# Altium PCB powerAmp.PcbDoc
Units mil, origin at the board's own origin, x right, y up, seen from the top; angles counter-clockwise.
Board outline 2750 x 2000 mil, 2 copper layers (Top Layer, Bottom Layer); 15 components, 0 nets, 32 pads, 0 vias.
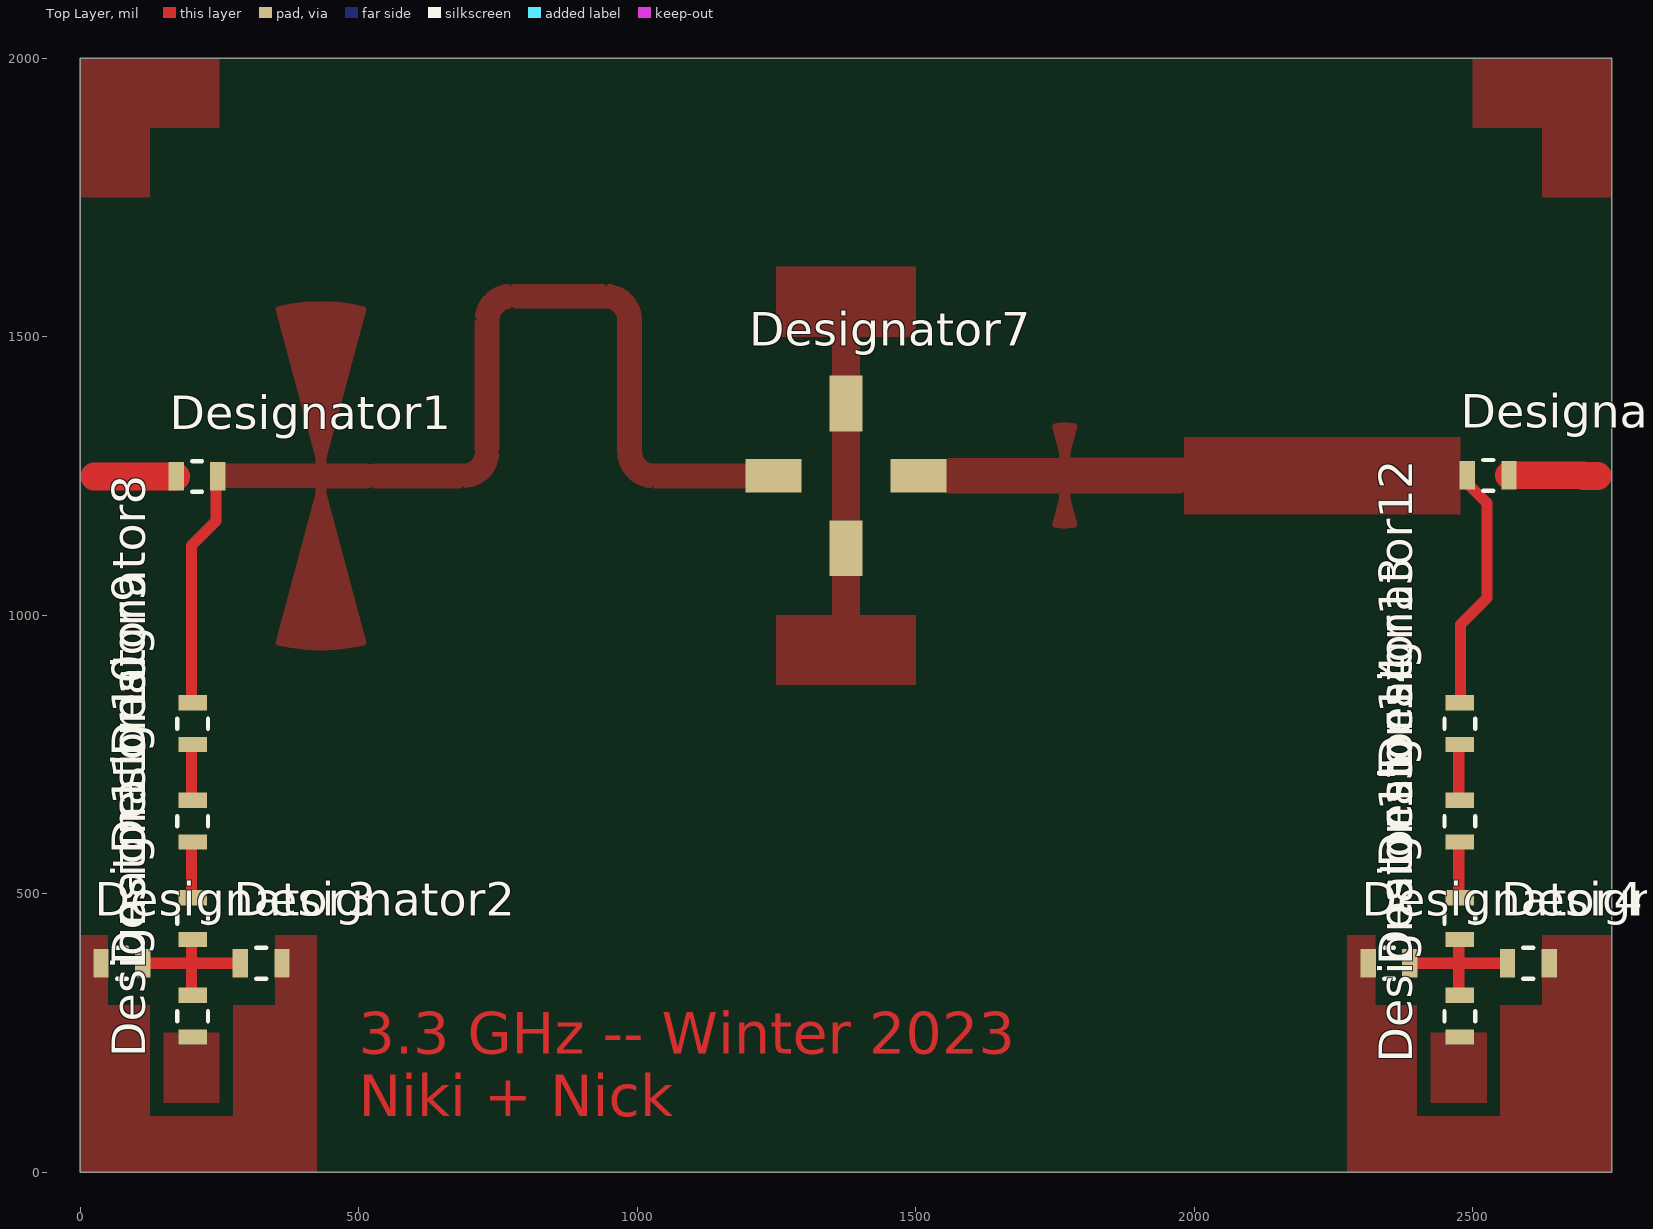
[diagram p0: Top Layer view]
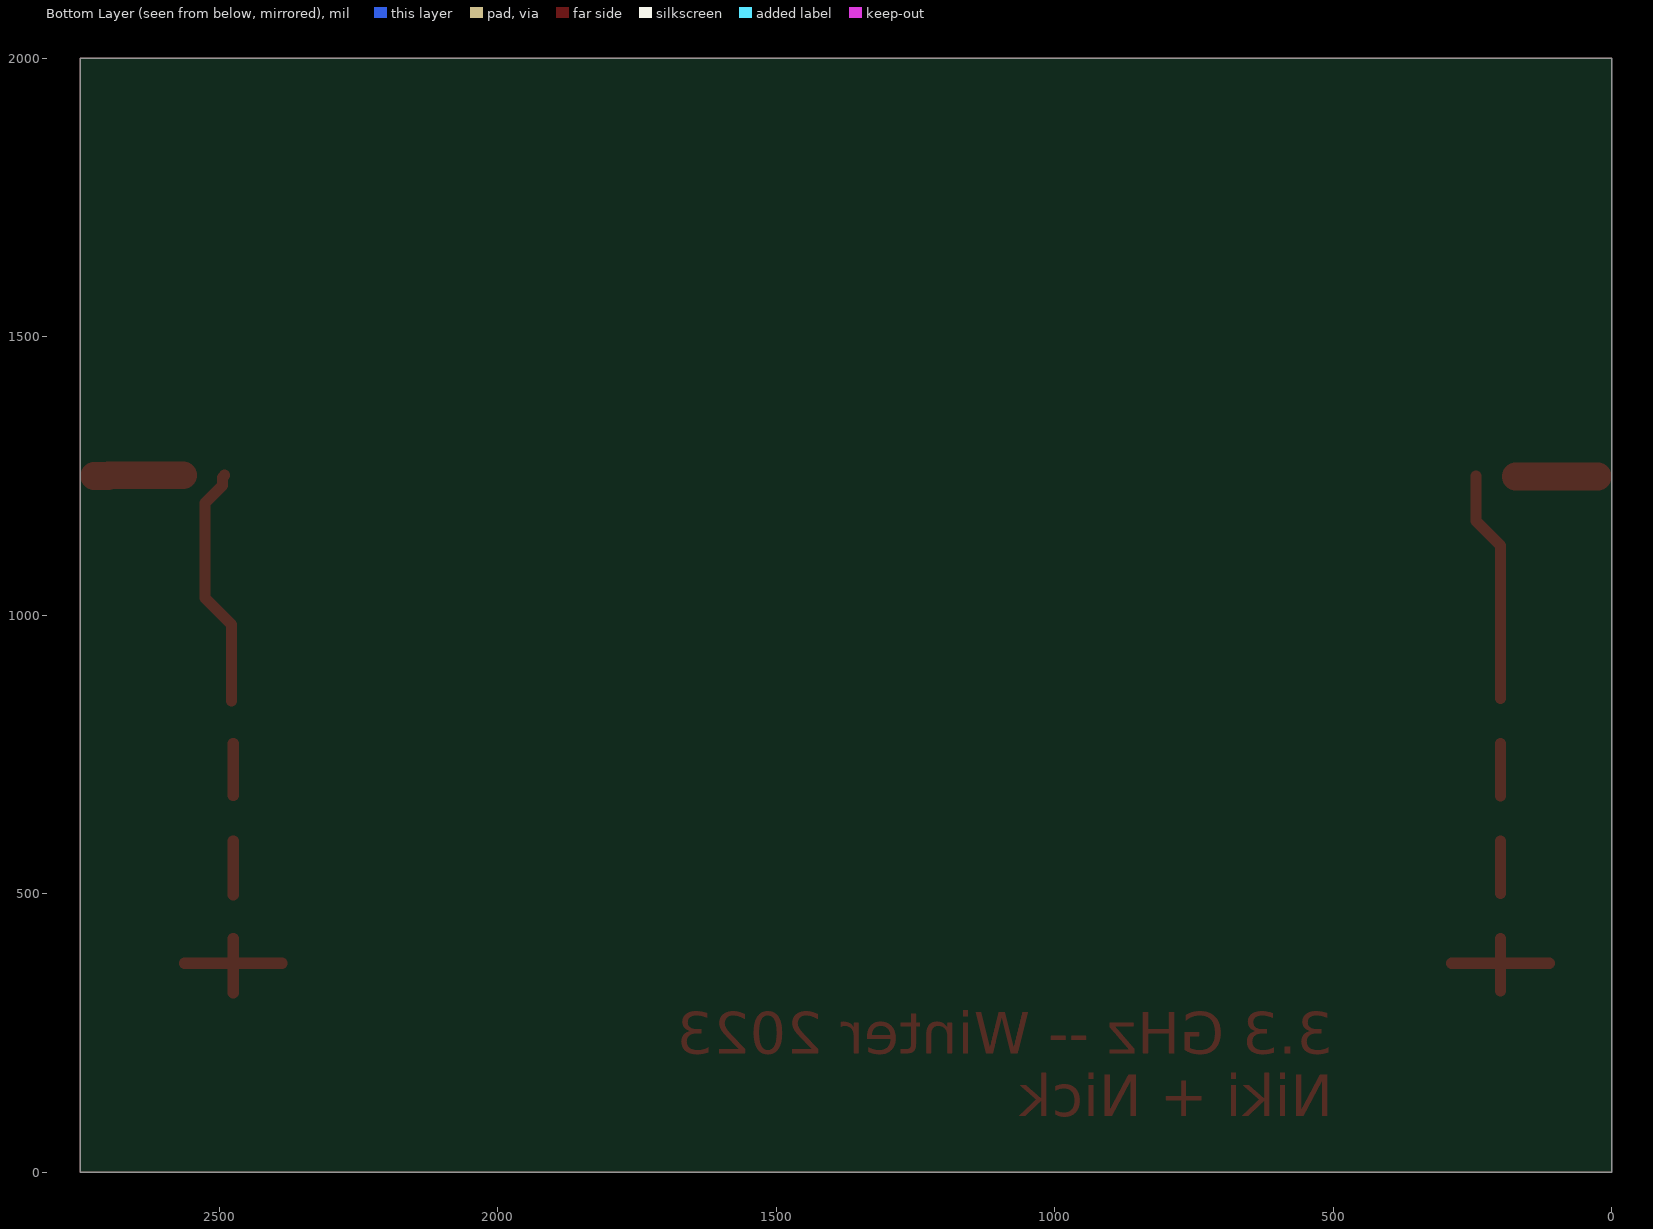
[diagram p1: Bottom Layer view, seen from below]

## Layer stack, top to bottom
Top Solder: solder mask 0.4, Solder Resist, Dk 3.5
Top Layer: signal copper 1.4
Dielectric 1: dielectric 12.6, FR-4, Dk 4.8
Bottom Layer: signal copper 1.4
Bottom Solder: solder mask 0.4, Solder Resist, Dk 3.5

## Board outline
0,0 0,2000 2750,2000 2750,0

## Design rules (kind name [scope] priority, off if disabled: settings)
Clearance Clearance_1 [All] p1: gap=0 ignorepadtopadclearanceinfootprint=FALSE
Clearance [All] p2: gap=10 ignorepadtopadclearanceinfootprint=FALSE except(0: Arc-Hole Track-Hole SMDPad-Hole THPad-Hole Via-Hole Fill-Hole Poly-Hole Region-Hole Text-Hole)
PlaneClearance [All] p1: clearance=0
PlaneConnect [All] p1: planeconnectstyle=Direct reliefexpansion=20 reliefentries=4 reliefconductorwidth=10 reliefairgap=10
PolygonConnect [All] p1: connectstyle=Direct reliefconductorwidth=10 reliefentries=4 polygonreliefangle="90 Angle" airgapwidth=10
RoutingVias [All] p1: holewidth=28 width=50 viastyle="Through Hole" minholewidth=28 minwidth=50 maxholewidth=28 maxwidth=50
SolderMaskExpansion [All] p1: expansion=4 istentingtop=FALSE
Width [All] p1: maxlimit=100 minlimit=10 preferedwidth=20 minimp=50.000000 maximp=50.000000 favimp=50.000000
28 further rules are at their usual default settings.

## Components (designator, comment, footprint, x,y, rotation, side; value= is the part's Value field where it differs from the comment)
Designator1 "Comment" FP-GRM21B-0_15-MFG 210,1249 r0 top
Designator2 "Comment" FP-GRM21B-0_15-MFG 325,375 r0 top
Designator3 "Comment" FP-GRM21B-0_15-MFG 75,375 r0 top
Designator4 "Comment" FP-GRM21B-0_15-MFG 2350,375 r0 top
Designator5 "Comment" FP-GRM21B-0_15-MFG 2600,375 r0 top
Designator6 "Comment" FP-GRM21B-0_15-MFG 2528,1251 r0 top
Designator7 "Comment" AT41486 1375,1250 r0 top locked
Designator8 "Comment" FP-GRM21B-0_15-MFG 202,805 r90 top
Designator9 "Comment" FP-GRM21B-0_15-MFG 202,630 r90 top
Designator10 "Comment" FP-GRM21B-0_15-MFG 202,455 r90 top
Designator11 "Comment" FP-GRM21B-0_15-MFG 202,280 r90 top
Designator12 "Comment" FP-GRM21B-0_15-MFG 2477,805 r90 top
Designator13 "Comment" FP-GRM21B-0_15-MFG 2477,630 r90 top
Designator14 "Comment" FP-GRM21B-0_15-MFG 2477,455 r90 top
Designator15 "Comment" FP-GRM21B-0_15-MFG 2477,280 r90 top

## Footprints (in the part's own frame and the unit in brackets; to place one, negate y for a bottom-side part, rotate by r counter-clockwise, add the part's x,y. Pads: shape width x height; smd on the part's side, far side on the other; paste and mask are expansions set on the pad)
AT41486 [mil]
  rect 100x60 smd: B(-130,0) C(130,0)
  rect 60x100 smd: E1(0,130) E2(0,-130)
FP-GRM21B-0_15-MFG [mm]
  rect 0.7x1.3 smd paste+0 mask+0: 1(-0.95,0) 2(0.95,0)
  silkscreen extent -0.23,-0.7 0.23,0.7, body extent -1.4,-0.8 1.4,0.8, height 0.25

## Nets (pads, with @x,y where several pads share a name; then routed paths per layer and width w, separated by ;. In a path a pad name is that pad's centre, name@x,y a point inside that pad or via, vN(x,y) a via of type N, cw(c..) or ccw(c..) an arc to the next point about the centre after c; other vN are vias at no path point)
pads on no net: Designator1.1 Designator1.2 Designator2.1 Designator2.2 Designator3.1 Designator3.2 Designator4.1 Designator4.2 Designator5.1 Designator5.2 Designator6.1 Designator6.2 Designator7.B Designator7.C Designator7.E1 Designator7.E2 Designator8.1 Designator8.2 Designator9.1 Designator9.2 Designator10.1 Designator10.2 Designator11.1 Designator11.2 Designator12.1 Designator12.2 Designator13.1 Designator13.2 Designator14.1 Designator14.2 Designator15.1 Designator15.2
copper on no net: | length 11582.4
  Top Layer w1: 0,0 0,1249 0,2000 2750,2000 2750,0 0,0
  Top Layer w20: 112.4,375 200,375 287.6,375 ; 200,325 200,419.45 ; 200,500 200,594.45 ; 200,675 200,769.45 ; 200,850 200,1125 244,1169 244,1250 ; 2387.4,375 2471.9,375 ; 2475,322 2475,375 ; 2475,419.45 2475,375 ; 2475,498 2475,594.45 ; 2475,676 2475,769.45 ; 2478,846 2478,983 2526,1031 2526,1201 2494.38,1232.62 2494.38,1247.22 2490.6,1251 ; 2562.6,375 2475,375
  Top Layer w50: 25.5,1249 172.6,1249 ; 2565.4,1251 2699,1251 2700,1250 2724.5,1250

## Polygon pours and split planes (outlines as drawn)
no net on Top Layer "NONET_L01_P-001" (solid, pour order 50): 2500,2000 2500,1875 2625,1875 2625,1750 2750,1750 2750,2000
no net on Top Layer "NONET_L01_P-001" (solid, pour order 49): 0,1750 125,1750 125,1875 250,1875 250,2000 0,2000
no net on Top Layer "NONET_L01_P-001" (solid, pour order 48): 2425,250 2525,250 2525,125 2425,125
no net on Top Layer "NONET_L01_P-001" (solid, pour order 47): 1250,1625 1500,1625 1500,1500 1400,1500 1400,1000 1500,1000 1500,875 1250,875 1250,1000 1350,1000 1350,1500 1250,1500
no net on Top Layer "NONET_L01_P-001" (solid, pour order 46): 2325,425 2325,300 2400,300 2400,100 2550,100 2550,300 2625,300 2625,425 2750,425 2750,0 2275,0 2275,425
no net on Top Layer "NONET_L01_P-001" (solid, pour order 45): 150,250 250,250 250,125 150,125
no net on Top Layer "NONET_L01_P-001" (solid, pour order 44): 50,425 50,300 125,300 125,100 275,100 275,300 350,300 350,425 425,425 425,0 0,0 0,425
no net on Top Layer "NONET_L01_P-001" (solid, pour order 42): 521.75,1228.26 521.75,1271.56 cw(c522.01,1271.56) 522.01,1271.83 687.37,1271.83 ccw(c687.37,1271.56) 687.35,1271.83 687.36,1271.83 691.11,1272.16 cw(c691.13,1271.89) 691.39,1271.89 cw(c691.13,1271.89) 691.15,1271.63 687.63,1271.32 687.63,1228.26 cw(c687.37,1228.26) 687.37,1227.99 522.01,1227.99 cw(c522.01,1228.26)
no net on Top Layer "NONET_L01_P-001" (solid, pour order 41): 773.98,1551.09 943.27,1551.09 943.27,1594.4 773.98,1594.4
no net on Top Layer "NONET_L01_P-001" (solid, pour order 40): 1030.15,1228.38 1030.15,1271.44 1026.63,1271.75 cw(c1026.66,1272.02) 1026.68,1272.28 1030.43,1271.95 1030.44,1271.95 ccw(c1030.42,1271.69) 1030.42,1271.95 1195.77,1271.95 cw(c1195.77,1271.69) 1196.04,1271.69 1196.04,1228.38 cw(c1195.77,1228.38) 1195.77,1228.11 1030.42,1228.11 cw(c1030.42,1228.38)
no net on Top Layer "NONET_L01_P-001" (solid, pour order 38): 966.88,1276.35 965.66,1281.88 cw(c966.07,1281.97) 965.65,1281.9 ccw(c965.92,1281.94) 965.65,1281.88 965.65,1281.91 964.91,1287.52 cw(c965.32,1287.57) 964.91,1287.54 ccw(c965.24,1287.56) 964.91,1287.52 964.91,1287.54 964.66,1293.2 cw(c965.22,1293.23) 964.66,1293.22 964.66,1529.44 ccw(c964.93,1529.44) 964.66,1529.42 964.66,1529.43 964.34,1533.15 963.37,1536.75 961.8,1540.13 959.66,1543.19 957.02,1545.82 953.97,1547.96 950.59,1549.54 946.99,1550.5 943.25,1550.83 cw(c943.27,1551.09) 943.01,1551.09 943.01,1594.4 cw(c943.27,1594.4) 943.29,1594.66 948.94,1594.42 cw(c948.93,1594.03) 948.97,1594.41 ccw(c948.93,1594.07) 948.95,1594.42 948.97,1594.42 954.58,1593.68 cw(c954.55,1593.38) 954.61,1593.67 960.14,1592.45 cw(c960.08,1592.16) 960.16,1592.44 965.57,1590.74 cw(c965.47,1590.43) 965.59,1590.73 970.82,1588.56 cw(c970.72,1588.29) 970.85,1588.55 975.88,1585.93 cw(c975.79,1585.75) 975.9,1585.92 980.68,1582.87 cw(c980.54,1582.66) 980.69,1582.86 985.19,1579.41 cw(c985.02,1579.19) 985.21,1579.4 ccw(c985.08,1579.26) 985.19,1579.41 985.21,1579.4 989.39,1575.57 cw(c989.23,1575.39) 989.4,1575.55 993.23,1571.37 cw(c993.09,1571.24) 993.24,1571.36 ccw(c993.13,1571.27) 993.23,1571.37 993.25,1571.35 996.69,1566.86 cw(c996.46,1566.68) 996.71,1566.84 999.75,1562.06 cw(c999.58,1561.94) 999.77,1562.04 1002.38,1557.01 cw(c1002.17,1556.9) 1002.39,1556.99 1004.56,1551.76 cw(c1004.18,1551.61) 1004.57,1551.74 1006.27,1546.34 cw(c1006.05,1546.26) 1006.28,1546.31 ccw(c1006.12,1546.28) 1006.27,1546.33 1006.28,1546.31 1007.51,1540.78 cw(c1007.21,1540.71) 1007.51,1540.76 ccw(c1007.34,1540.73) 1007.51,1540.77 1007.51,1540.75 1008.25,1535.14 cw(c1008,1535.1) 1008.25,1535.12 cw(c1007.17,1535.08) 1008.25,1535.1 1008.5,1529.46 cw(c1007.94,1529.43) 1008.5,1529.44 1008.5,1293.22 ccw(c1008.28,1293.22) 1008.5,1293.24 1008.5,1293.23 1008.83,1289.5 1009.79,1285.9 1011.37,1282.52 1013.5,1279.47 1016.14,1276.83 1019.19,1274.7 1022.57,1273.12 1026.17,1272.16 1029.91,1271.83 cw(c1029.89,1271.56) 1030.15,1271.56 1030.15,1228.26 cw(c1029.89,1228.26) 1029.88,1227.99 1024.22,1228.24 cw(c1024.24,1228.64) 1024.2,1228.24 1018.58,1228.98 cw(c1018.63,1229.39) 1018.55,1228.99 ccw(c1018.61,1229.26) 1018.57,1228.98 1018.55,1228.99 1013.02,1230.21 cw(c1013.09,1230.51) 1013,1230.22 1007.59,1231.92 cw(c1007.7,1232.25) 1007.57,1231.93 ccw(c1007.66,1232.14) 1007.59,1231.92 1007.57,1231.93 1002.34,1234.1 cw(c1002.46,1234.4) 1002.31,1234.11 997.29,1236.73 cw(c997.39,1236.94) 997.27,1236.74 992.49,1239.78 cw(c992.64,1240.02) 992.47,1239.8 987.97,1243.24 cw(c988.21,1243.55) 987.95,1243.26 ccw(c988.14,1243.46) 987.97,1243.25 987.95,1243.26 983.78,1247.09 cw(c983.97,1247.3) 983.76,1247.1 979.93,1251.28 cw(c980.15,1251.48) 979.92,1251.3 976.47,1255.79 cw(c976.74,1256.01) 976.45,1255.82 973.41,1260.6 cw(c973.63,1260.74) 973.4,1260.62 970.78,1265.64 cw(c971.02,1265.77) 970.77,1265.66 968.6,1270.9 cw(c968.98,1271.05) 968.59,1270.92 ccw(c968.79,1270.98) 968.6,1270.9 968.59,1270.92 966.89,1276.32 cw(c967.24,1276.43)
no net on Top Layer "NONET_L01_P-001" (solid, pour order 37): 708.76,1293.22 708.76,1529.44 cw(c709.02,1529.44) 708.76,1529.45 709,1535.11 cw(c709.37,1535.09) 709.01,1535.14 709.75,1540.75 cw(c710.15,1540.7) 709.75,1540.78 710.98,1546.3 cw(c711.37,1546.21) 710.98,1546.33 712.69,1551.73 cw(c713.08,1551.61) 712.69,1551.76 714.86,1556.99 cw(c715.18,1556.86) 714.87,1557.01 717.49,1562.04 cw(c717.7,1561.93) 717.5,1562.06 720.55,1566.84 cw(c720.77,1566.7) 720.56,1566.86 724.01,1571.35 cw(c724.28,1571.14) 724.02,1571.37 727.85,1575.55 cw(c728.04,1575.38) 727.87,1575.57 732.05,1579.4 cw(c732.25,1579.18) 732.07,1579.41 736.56,1582.86 cw(c736.76,1582.6) 736.58,1582.87 741.36,1585.92 cw(c741.49,1585.72) 741.38,1585.93 746.41,1588.55 cw(c746.51,1588.34) 746.43,1588.56 751.66,1590.72 cw(c751.81,1590.34) 751.68,1590.73 757.09,1592.44 cw(c757.18,1592.14) 757.11,1592.44 762.64,1593.67 cw(c762.7,1593.4) 762.67,1593.67 768.28,1594.41 cw(c768.33,1594.08) 768.31,1594.42 773.97,1594.66 cw(c773.99,1594.1) 773.98,1594.66 943.27,1594.66 cw(c943.27,1594.4) 943.54,1594.4 cw(c943.27,1594.4) 943.27,1594.13 774.25,1594.13 774.25,1551.36 943.27,1551.36 cw(c943.27,1551.09) 943.54,1551.09 cw(c943.27,1551.09) 943.27,1550.83 773.98,1550.83 ccw(c773.98,1551.09) 774.01,1550.83 773.99,1550.83 770.27,1550.5 766.67,1549.54 763.29,1547.96 760.23,1545.82 757.6,1543.19 755.46,1540.13 753.88,1536.75 752.92,1533.15 752.59,1529.43 752.59,1529.42 ccw(c752.33,1529.44) 752.59,1529.44 752.59,1293.22 cw(c752.33,1293.22) 752.06,1293.22 752.06,1529.17 709.29,1529.17 709.29,1293.22 cw(c709.02,1293.22)
no net on Top Layer "NONET_L01_P-001" (solid, pour order 36): 705.88,1282.5 ccw(c706.12,1282.39) 706.36,1282.28 707.96,1285.7 ccw(c707.72,1285.81) 707.97,1285.74 708.95,1289.39 ccw(c708.7,1289.46) 708.96,1289.43 709.26,1292.95 752.05,1292.95 751.82,1287.58 751.08,1281.97 ccw(c751.34,1281.94) 751.6,1281.9 752.34,1287.52 ccw(c752.01,1287.56) 752.35,1287.54 752.59,1293.2 ccw(c752.03,1293.23) 752.59,1293.22 752.59,1529.44 cw(c752.37,1529.44) 752.59,1529.42 752.59,1529.43 752.92,1533.15 753.88,1536.75 755.47,1540.15 ccw(c755.23,1540.27) 755.49,1540.27 ccw(c755.23,1540.27) 754.99,1540.38 753.39,1536.96 ccw(c753.64,1536.84) 753.38,1536.91 752.4,1533.27 ccw(c752.65,1533.2) 752.39,1533.22 752.09,1529.7 709.3,1529.7 709.53,1535.08 710.27,1540.68 ccw(c710,1540.72) 710.27,1540.72 ccw(c710.01,1540.72) 709.75,1540.75 709.01,1535.14 ccw(c709.33,1535.09) 709,1535.12 cw(c709.24,1535.1) 709.01,1535.13 709,1535.12 708.76,1529.46 ccw(c709.32,1529.43) 708.76,1529.44 708.76,1293.22 cw(c709.02,1293.22) 708.76,1293.24 708.76,1293.23 708.43,1289.5 707.47,1285.9
no net on Top Layer "NONET_L01_P-001" (solid, pour order 35): 687.37,1228.26 693.03,1228.5 698.65,1229.24 704.18,1230.47 709.59,1232.18 714.82,1234.34 719.85,1236.96 724.63,1240.01 729.12,1243.46 733.3,1247.28 737.13,1251.46 740.58,1255.96 743.63,1260.74 746.24,1265.76 748.41,1271 750.12,1276.41 751.34,1281.94 752.08,1287.56 752.33,1293.22 709.02,1293.22 708.69,1289.46 707.72,1285.81 706.12,1282.39 703.96,1279.3 701.29,1276.63 698.19,1274.47 694.77,1272.87 691.13,1271.89 687.37,1271.56
no net on Top Layer "NONET_L01_P-001" (solid, pour order 34): 442.03,1218.35 cw(c442.29,1218.41) 442.02,1218.41 442.02,1281.41 cw(c442.29,1281.41) 442.03,1281.48 514.73,1552.77 cw(c514.98,1552.71) 515.25,1552.71 cw(c514.98,1552.71) 515.24,1552.64 442.55,1281.37 442.55,1271.83 687.37,1271.83 cw(c687.37,1271.56) 687.63,1271.56 cw(c687.37,1271.56) 687.37,1271.3 522.28,1271.3 522.28,1228.52 687.37,1228.52 cw(c687.37,1228.26) 687.63,1228.26 cw(c687.37,1228.26) 687.37,1227.99 442.55,1227.99 442.55,1218.45 515.24,947.18 cw(c514.98,947.12) 515.25,947.12 cw(c514.98,947.12) 514.73,947.05
no net on Top Layer "NONET_L01_P-001" (solid, pour order 33): 257.25,1228.26 422.6,1228.26 422.6,1271.56 257.25,1271.56
no net on Top Layer "NONET_L01_P-001" (solid, pour order 32): 377.07,941.09 404.65,937.46 432.45,936.25 460.24,937.46 487.82,941.09 514.98,947.12 442.29,1218.41 442.29,1281.41 514.98,1552.71 487.82,1558.73 460.24,1562.36 432.45,1563.57 404.65,1562.36 377.07,1558.73 349.91,1552.71 422.6,1281.41 422.6,1218.41 349.91,947.12
no net on Top Layer "NONET_L01_P-001" (solid, pour order 29): 1553.25,1218.91 1757.97,1218.91 1757.97,1281.9 1553.25,1281.9
no net on Top Layer "NONET_L01_P-001" (solid, pour order 28): 1744.38,1158.34 1752.09,1156.63 1759.92,1155.59 1767.82,1155.25 1775.71,1155.59 1783.54,1156.63 1791.25,1158.34 1777.66,1209.07 1777.66,1291.75 1791.25,1342.48 1783.54,1344.19 1775.71,1345.22 1767.82,1345.56 1759.92,1345.22 1752.09,1344.19 1744.38,1342.48 1757.97,1291.75 1757.97,1209.07
no net on Top Layer "NONET_L01_P-001" (solid, pour order 30): 1777.39,1209.07 1777.39,1291.75 cw(c1777.66,1291.75) 1777.92,1291.75 1777.92,1282.17 1982.38,1282.17 cw(c1982.38,1281.9) 1982.65,1281.9 1982.65,1218.91 cw(c1982.38,1218.91) 1982.38,1218.65 1777.92,1218.65 1777.92,1209.07 cw(c1777.66,1209.07)
no net on Top Layer "NONET_L01_P-001" (solid, pour order 31): 1982.38,1181.51 2477.66,1181.51 2477.66,1319.3 1982.38,1319.3

## Other copper
Top Layer:
  text "3.3 GHz -- Winter 2023 / Niki + Nick" at 500,100 h75

## Silkscreen, mask and mechanical layers (free items; w line width, h text height)
Mechanical 2:
  drawing of 188 lines, arcs and shapes, not listed